# Altium PCB test1.PcbDoc
Units mil, origin at the board's own origin, x right, y up, seen from the top; angles counter-clockwise.
Board outline 6000 x 4000 mil, 2 copper layers (Top Layer, Bottom Layer); 63 components, 39 nets, 223 pads, 23 vias.
Unrouted connection lines stored in the file: 1.
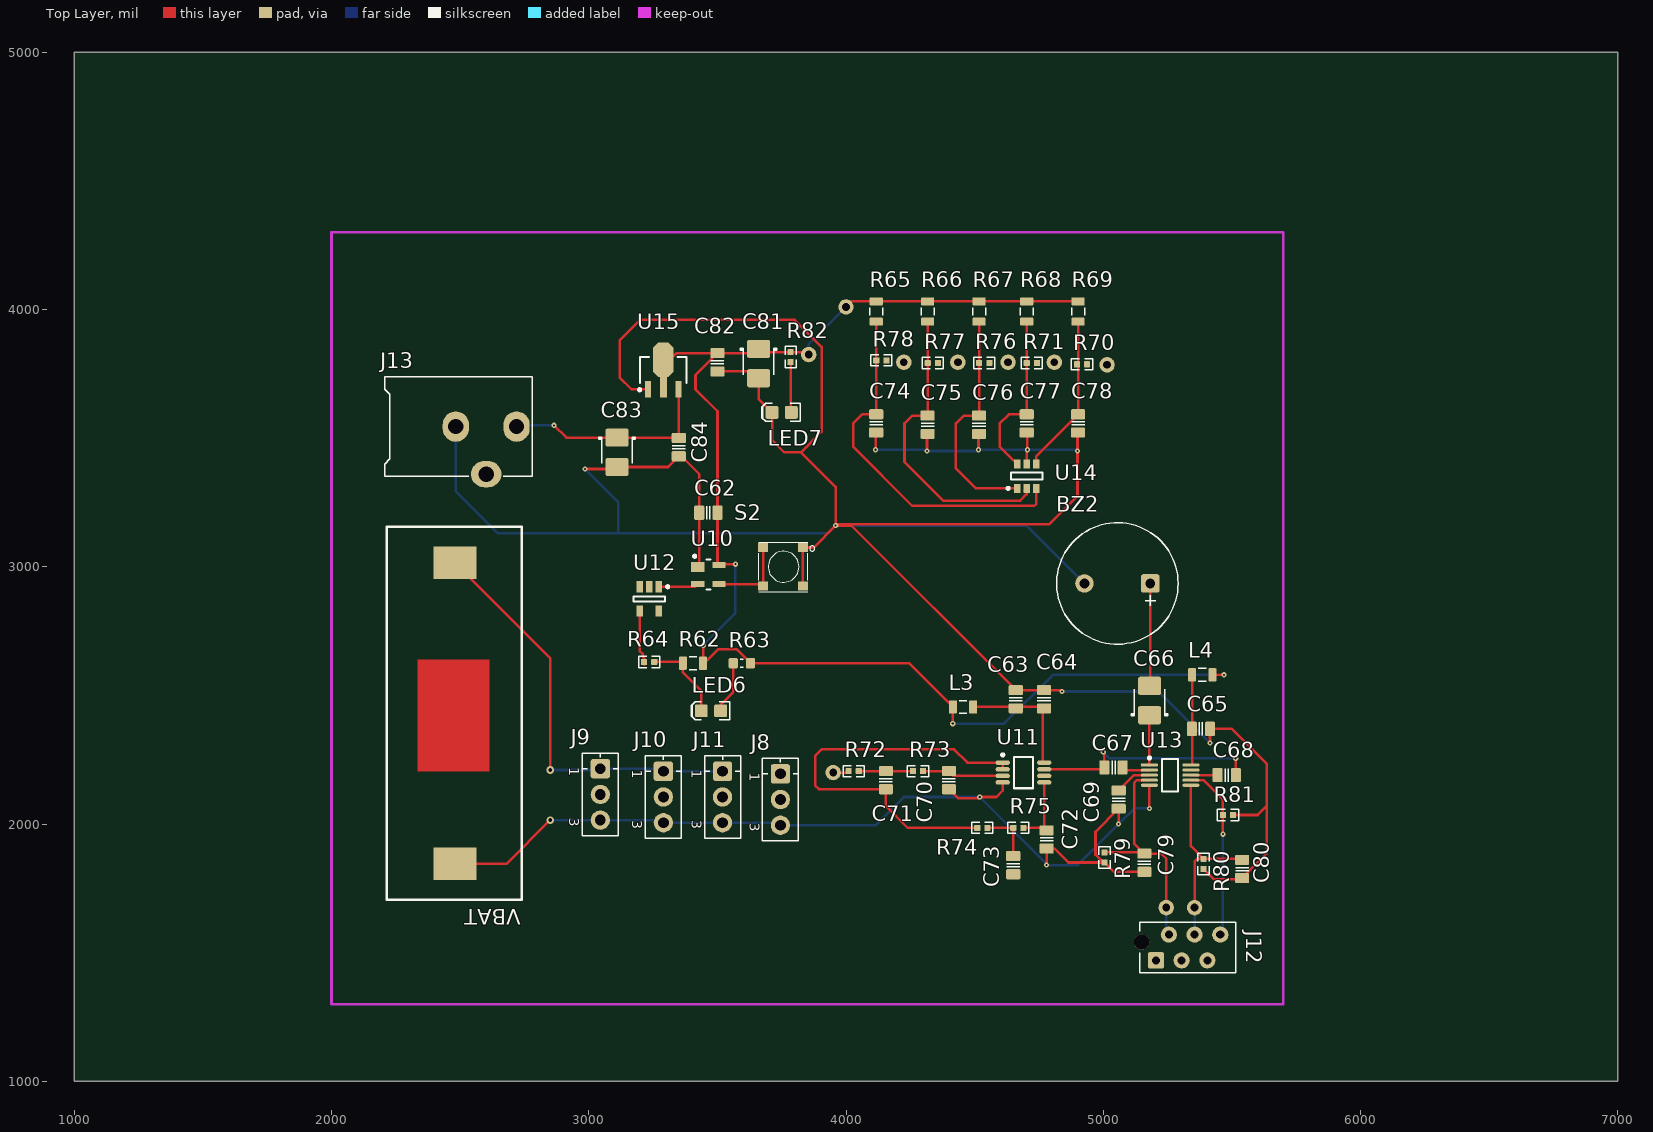
[diagram p0: Top Layer view]
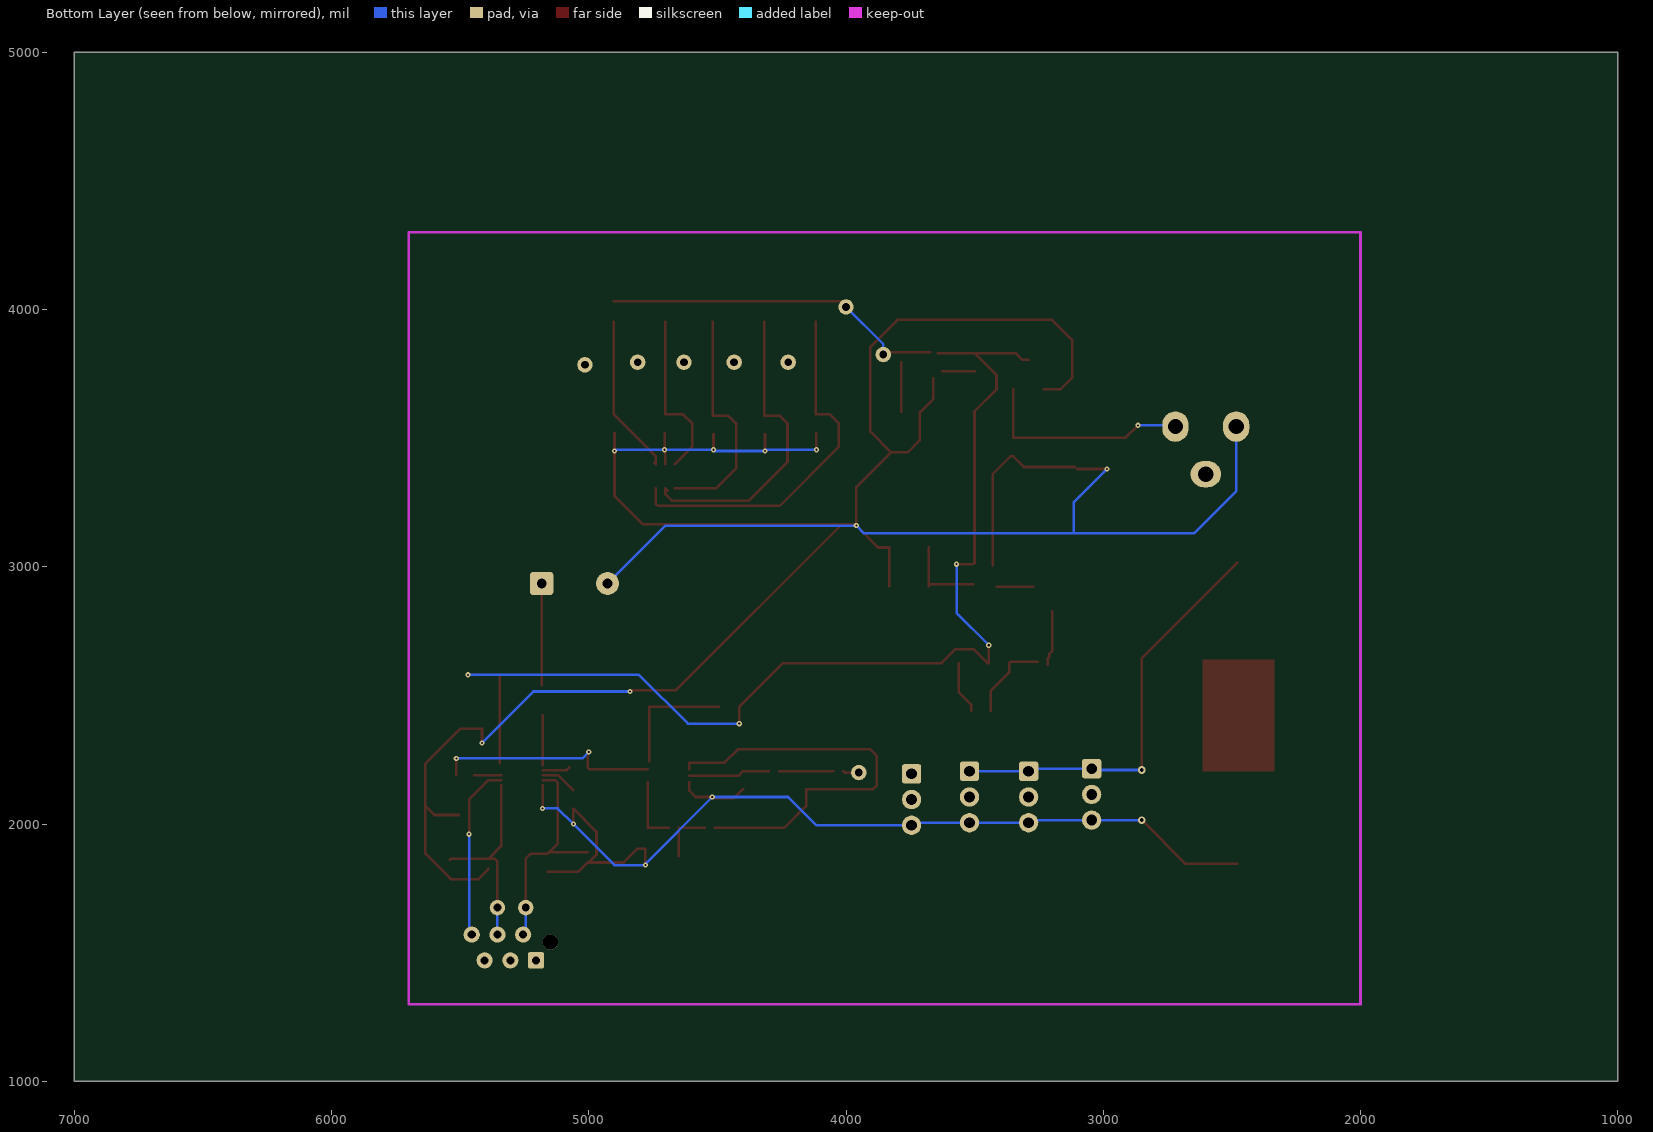
[diagram p1: Bottom Layer view, seen from below]
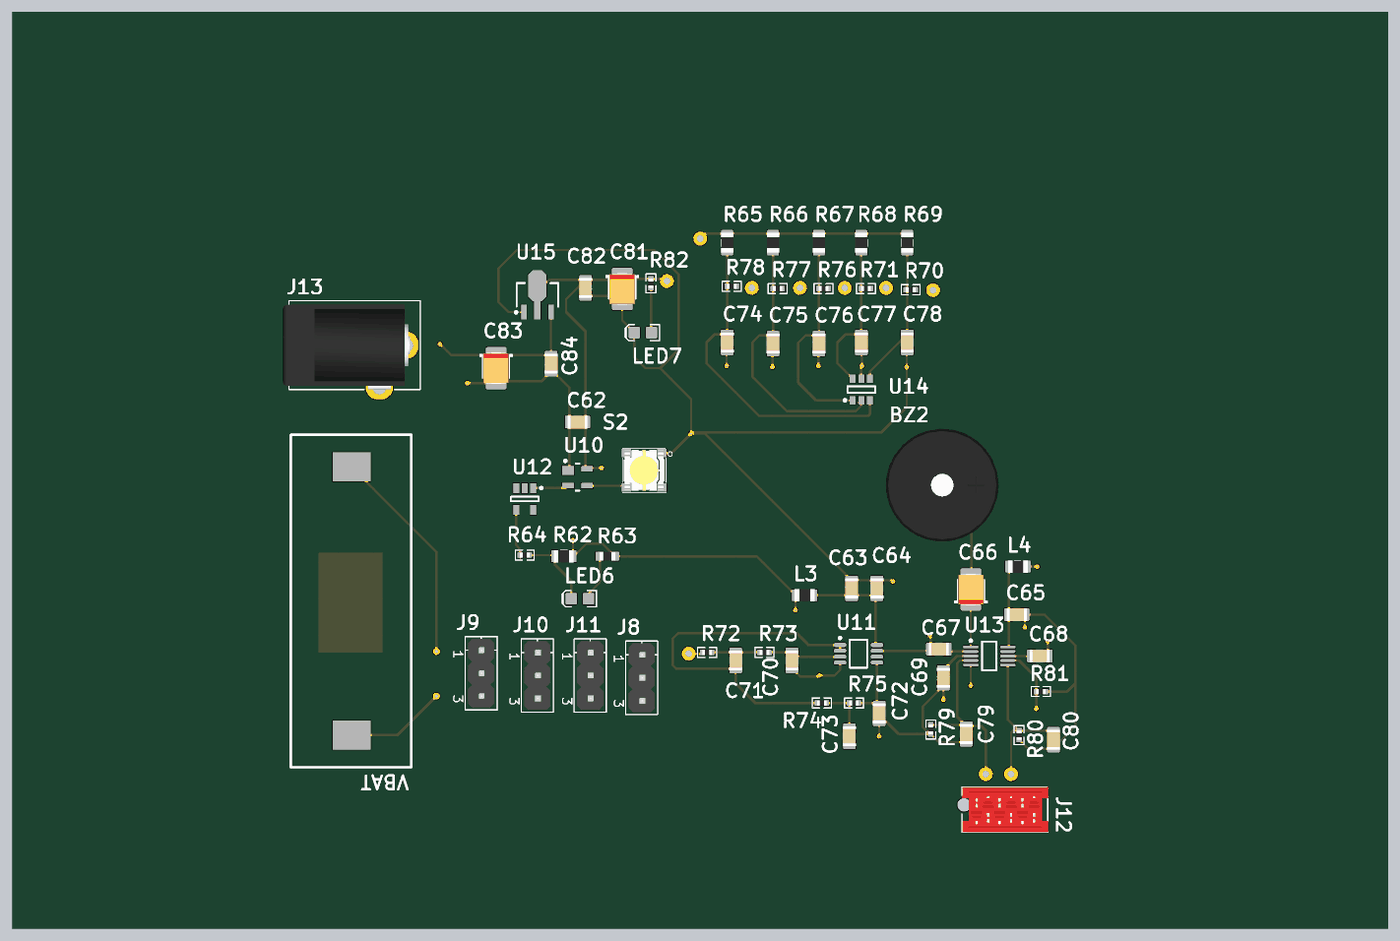
[diagram p2: 3D render of the assembled board from above, using the file's embedded part models]

## Layer stack, top to bottom
Top Layer: signal copper 1.4
Dielectric: dielectric 12.6, FR-4, Dk 4.8
Bottom Layer: signal copper 1.4

## Board outline
1000,1000 7000,1000 7000,5000 1000,5000

## Design rules (kind name [scope] priority, off if disabled: settings)
Clearance [All] p1: gap=10
PolygonConnect [All] p1: connectstyle=Relief reliefconductorwidth=10 reliefentries=4 polygonreliefangle="90 Angle"
RoutingVias [All] p1: holewidth=28 width=50 viastyle="Through Hole" minholewidth=28 minwidth=50 maxholewidth=28 maxwidth=50
SilkscreenOverComponentPads [All] p1: minsilkscreentomaskgap=10
SolderMaskExpansion [All] p1: expansion=4
Width [All] p1: maxlimit=10 minlimit=10 preferedwidth=10
27 further rules are at their usual default settings.

## Components (designator, comment, footprint, x,y, rotation, side; value= is the part's Value field where it differs from the comment)
BZ2 "Alternate part: 3100-932" BUZZER_12.0X8.5MM 5055,2935 r180 top
C62 "approved sub OK" CAPC2012N 3465,3210 r180 top
C63 "approved sub OK" CAPC2012N 4660,2485 r270 top
C64 "approved sub OK" CAPC2012N 4770,2485 r270 top
C65 "approved sub OK" CAPC2012N 5380,2370 r180 top
C66 "Value" CAPMP3528X210N 5180,2480 r90 top
C67 "approved sub OK" CAPC2012N 5040,2220 r0 top
C68 "approved sub OK" CAPC2012N 5480,2190 r0 top
C69 "approved sub OK" CAPC2012N 5060,2095 r90 top
C70 "approved sub OK" CAPC2012N 4400,2170.75 r270 top
C71 "approved sub OK" CAPC2012N 4155,2170.75 r270 top
C72 "approved sub OK" CAPC2012N 4780,1940 r270 top
C73 "approved sub OK" CAPC2012N 4650,1840 r270 top
C74 "approved sub OK" CAPC2012N 4117.4,3557.24 r270 top
C75 "approved sub OK" CAPC2012N 4317.4,3552.24 r270 top
C76 "approved sub OK" CAPC2012N 4517.4,3552.24 r270 top
C77 "approved sub OK" CAPC2012N 4702.4,3557.24 r270 top
C78 "approved sub OK" CAPC2012N 4902.4,3557.24 r270 top
C79 "approved sub OK" CAPC2012N 5160,1849.57 r270 top
C80 "approved sub OK" CAPC2012N 5540,1825 r270 top
C81 "Value" CAPMP3528X210N 3660,3790 r270 top
C82 "approved sub OK" CAPC2012N 3500,3795 r90 top
C83 "Value" CAPMP3528X210N 3110,3445 r270 top
C84 "approved sub OK" CAPC2012N 3350,3465 r90 top
J8 "CONN_HEADER_1x3P_0.100in" 1x3POS_HEADER 3745,2095 r0 top
J9 "CONN_HEADER_1x3P_0.100in" 1x3POS_HEADER 3045,2115 r0 top
J10 "CONN_HEADER_1x3P_0.100in" 1x3POS_HEADER 3290,2105 r0 top
J11 "CONN_HEADER_1x3P_0.100in" 1x3POS_HEADER 3520,2105 r0 top
J12 "micro-match socket" 6P_PCB_SOCKET_BRD_MNT_MICRO-MATCH 5330,1520 r180 top
J13 "CONN_PWR_JACK_2.1x5.5mm" CONN_PWR_JACK_2.1x5.5mm 2180,3545 r90 top
L3 "Thick Film" RESC2012N 4455,2455 r0 top
L4 "Thick Film" RESC2012N 5385,2580 r0 top
LED6 "Red" LED-0805-A 3475,2440 r180 top
LED7 "Green" LED-0805-K 3750,3600 r180 top
R62 "Thick Film" RESC2012N 3405,2625 r180 top
R63 "Thick Film" RESC1608N 3595,2625 r180 top
R64 "Thick Film" RESC1005N#1 3235,2630 r0 top
R65 "Thick Film" RESC2012N 4117.4,3992.24 r270 top
R66 "Thick Film" RESC2012N 4317.4,3992.24 r270 top
R67 "Thick Film" RESC2012N 4517.4,3992.24 r270 top
R68 "Thick Film" RESC2012N 4702.4,3992.24 r270 top
R69 "Thick Film" RESC2012N 4902.4,3992.24 r270 top
R70 "Thick Film" RESC1005N#2 4917.4,3787.24 r180 top
R71 "Thick Film" RESC1005N#2 4722.4,3792.24 r180 top
R72 "Thick Film" RESC1005N#3 4030,2205.75 r0 top
R73 "Thick Film" RESC1005N#2 4280,2205.75 r0 top
R74 "Thick Film" RESC1005N#2 4530,1985 r180 top
R75 "Thick Film" RESC1005N#2 4670,1985 r0 top
R76 "Thick Film" RESC1005N#2 4537.4,3792.24 r180 top
R77 "Thick Film" RESC1005N#2 4337.4,3792.24 r180 top
R78 "Thick Film" RESC1005N#2 4137.4,3802.24 r180 top
R79 "Thick Film" RESC1005N#2 5005,1869.88 r90 top
R80 "Thick Film" RESC1005N#2 5390,1845 r90 top
R81 "Thick Film" RESC1005N#2 5485,2035 r180 top
R82 "Thick Film" RESC1005N#2 3785,3815 r90 top
S2 "SW_THT_PB_5.0mm" SWITCH_TACT-EVQPQxB55 3755,3000 r0 top
U10 "CAT811S" SOT-143-RC4_N 3465,2970 r0 top
U11 "MCP6022" MSOP-UA8_L 4690,2200 r0 top
U12 "74LVC1G125GW" SOT-23-CT5_N 3235,2875 r270 top
U13 "LM4811MM" MSOP-UN10_N 5260,2190 r0 top
U14 "ALPS-SKQU" SOT-23-CH6_L 4702.4,3352.24 r90 top
U15 "LM1117M3-3.3" SOT-89-MB3_M 3290,3765 r90 top
VBAT "" PCBComponent_1 2590,2280 r270 top

## Footprints (in the part's own frame and the unit in brackets; to place one, negate y for a bottom-side part, rotate by r counter-clockwise, add the part's x,y. Pads: shape width x height; smd on the part's side, far side on the other; paste and mask are expansions set on the pad)
1x3POS_HEADER [mil] "Connector Header, Single-row 3-position, 0.100\" pitch"
  rrect25% 75x75 hole 42: 1(0,100)
  round 75 hole 42: 2(0,0) 3(0,-100)
  silkscreen extent -70,-160 70,160, body extent -57,-150 57,150, height 335
6P_PCB_SOCKET_BRD_MNT_MICRO-MATCH [mm] "SOCKET MICRO-MATCH BRD MNT 6POS 2.54MM"
  round 1.016 on Mech14: 0(0,0)
  rrect25% 1.6x1.6 hole 0.8: 1(3.175,1.27)
  round 1.6 hole 0.8: 2(1.905,-1.27) 3(0.635,1.27) 4(-0.635,-1.27) 5(-1.905,1.27) 6(-3.175,-1.27)
  round 1.5 hole 1.5 unplated: MH(4.575,-0.53)
  silkscreen extent -4.7,-2.5 4.8,2.5, body extent -4.77,-2.5 4.78,2.5, height 4
BUZZER_12.0X8.5MM [mil]
  round 20 on Mech14: 0(0,0)
  rrect25% 72x72 / inner rrect25% 72x72 / far side rrect25% 90x90 hole 38: 1(-127.95,0)
  round 72 / inner round 72 / far side round 90 hole 38: 2(127.95,0)
  silkscreen extent -236,-236 236,236, body extent -246,-246 246,246, height 354
CAPC2012N [mm] "Chip Capacitor, Body 2.0x1.2mm, 0805, IPC Medium Density"
  round 0.254 on Mech14: 0(0,0)
  rrect25% 1x1.4 smd: 1(-0.9,0) 2(0.9,0)
  Top Layer pour cut-out: -0.4,0.8 0.4,0.8 0.4,-0.8 -0.4,-0.8
  silkscreen extent -0.15,-0.65 0.15,0.65, body extent -1.1,-0.72 1.1,0.73, height 1.34
CAPMP3528X210N [mm] "Molded body capacitor, Body 3.5x2.8mm, 1210, IPC Nominal settings"
  round 0.254 on Mech14: 0(0,0)
  rrect25% 1.8x2.3 smd: 1(-1.45,0) 2(1.45,0)
  Top Layer pour cut-out: -0.508,1.27 0.508,1.27 0.508,-1.27 -0.508,-1.27
  silkscreen extent -1.5,-1.8 1.1,1.8, body extent -1.75,-1.4 1.75,1.4, height 2.1
CONN_PWR_JACK_2.1x5.5mm [mm] "Power Connector, 2.1mm ID, 5.5mm OD"
  oval 3x2.6 hole 1.511: 1(0,-13.7) 2(0,-7.7)
  oval 2.6x3 hole 1.511: 3(-4.7,-10.7)
  silkscreen extent -4.9,-15.22 4.92,-0.7, body extent -4.9,-14.1 4.5,0, height 11
LED-0805-A [mil]
  round 20 on Mech14: 0(0,0)
  rrect25% 50x50 smd: A(-37.5,0) K(37.5,0)
  Top Layer pour cut-out: -15,30 15,30 15,-30 -15,-30
  silkscreen extent -72,-35 77,35, body extent -39,-25 39,25, height 31
LED-0805-K [mil]
  round 20 on Mech14: 0(0,0)
  rrect25% 50x50 smd: A(-37.5,0) K(37.5,0)
  Top Layer pour cut-out: -15,30 15,30 15,-30 -15,-30
  silkscreen extent -72,-35 77,35, body extent -39,-25 39,25, height 31
MSOP-UA8_L [mm] "TSOP, 8-Leads, Body 3x3mm, Pitch 0.65mm, IPC High Density"
  oval 1.4x0.45 smd: 1(-2.05,0.975) 2(-2.05,0.325) 3(-2.05,-0.325) 4(-2.05,-0.975) 5(2.05,-0.975) 6(2.05,-0.325) 7(2.05,0.325) 8(2.05,0.975)
  silkscreen extent -2.17,-1.55 0.95,1.87, body extent -1.6,-1.6 1.6,1.6, height 1.1
MSOP-UN10_N [mm] "TSSOP, 10-Leads, Body 3x3mm, Pitch 0.5mm, IPC Medium Density"
  oval 1.7x0.3 smd: 1(-2.05,1) 2(-2.05,0.5) 3(-2.05,0) 4(-2.05,-0.5) 5(-2.05,-1) 6(2.05,-1) 7(2.05,-0.5) 8(2.05,0) 9(2.05,0.5) 10(2.05,1)
  silkscreen extent -2.17,-1.6 0.8,1.82, body extent -1.6,-1.6 1.6,1.6, height 1.1
PCBComponent_1 [mil]
  rect 125.98x165.35 smd: GND(435,-110) VCC(-735,-110)
  Top Layer region: -360,-255 75,-255 75,25 -360,25
  silkscreen extent -875,-375 575,150
RESC1005N#1 [mm] "Chip Resistor, Body 1.0x0.5mm, EIA 0402, IPC Medium Density"
  round 0.2 on Mech14: 0(0,0)
  rrect20% 0.6x0.6 smd: 2(0.5,0) Y(-0.5,0)
  Top Layer pour cut-out: -0.2,0.35 0.2,0.35 0.2,-0.35 -0.2,-0.35
  silkscreen extent -1.05,-0.55 1.05,0.55, body extent -0.52,-0.27 0.53,0.28, height 0.4
RESC1005N#2 [mm] "Chip Resistor, Body 1.0x0.5mm, EIA 0402, IPC Medium Density"
  round 0.2 on Mech14: 0(0,0)
  rrect20% 0.6x0.6 smd: 1(-0.5,0) 2(0.5,0)
  Top Layer pour cut-out: -0.2,0.35 0.2,0.35 0.2,-0.35 -0.2,-0.35
  silkscreen extent -1.05,-0.55 1.05,0.55, body extent -0.52,-0.27 0.53,0.28, height 0.4
RESC1005N#3 [mm] "Chip Resistor, Body 1.0x0.5mm, EIA 0402, IPC Medium Density"
  round 0.2 on Mech14: 0(0,0)
  rrect20% 0.6x0.6 smd: 2(0.5,0) p0(-0.5,0)
  Top Layer pour cut-out: -0.2,0.35 0.2,0.35 0.2,-0.35 -0.2,-0.35
  silkscreen extent -1.05,-0.55 1.05,0.55, body extent -0.52,-0.27 0.53,0.28, height 0.4
RESC1608N [mm] "Chip Resistor, Body 1.6x0.8mm, 0603, IPC Medium Density"
  round 0.254 on Mech14: 0(0,0)
  rrect25% 0.9x1 smd: 1(-0.85,0) 2(0.85,0)
  Top Layer pour cut-out: -0.4,0.6 0.4,0.6 0.4,-0.6 -0.4,-0.6
  silkscreen extent -0.15,-0.41 0.15,0.41, body extent -0.87,-0.47 0.88,0.48, height 0.54
RESC2012N [mm] "Chip Resistor, Body 2.0x1.2mm, 0805, IPC Medium Density"
  round 0.254 on Mech14: 0(0,0)
  rrect25% 0.8x1.3 smd: 1(-1,0) 2(1,0)
  Top Layer pour cut-out: -0.6,0.75 0.6,0.75 0.6,-0.75 -0.6,-0.75
  silkscreen extent -0.38,-0.64 0.38,0.64, body extent -1.1,-0.67 1.1,0.68, height 0.69
SOT-23-CH6_L [mm] "SOT23, 6-Leads, Body 2.9x1.6mm, Pitch 0.95mm, Lead Span 2.7mm, IPC High Density"
  rect 0.9x0.65 smd: 1(-1.2,0.95) 2(-1.2,0) 3(-1.2,-0.95) 4(1.2,-0.95) 5(1.2,0) 6(1.2,0.95)
  silkscreen extent -1.32,-1.55 0.35,1.95, body extent -0.9,-1.55 0.9,1.55, height 1.45
SOT-23-CT5_N [mm] "SOT23, 5-Leads, Body 2.9x1.6mm, Pitch 0.95mm, Lead Span 2.7mm, IPC Medium Density"
  rect 1.1x0.65 smd: 1(-1.2,0.95) 2(-1.2,0) 3(-1.2,-0.95) 5(1.2,0.95) Y(1.2,-0.95)
  silkscreen extent -1.32,-1.55 0.25,1.95, body extent -0.9,-1.55 0.9,1.55, height 1.45
SOT-89-MB3_M [mm] "SOT89, 3-Leads, Body 4.5x2.4 mm, Pitch 1.5mm, Lead Span 4.1mm, IPC Low Density"
  rect 1.6x0.6 smd: 1(-1.9,1.5) 3(-1.9,-1.5)
  rect 2x0.7 smd: 2(-1.7,0)
  oct 3.4x2 smd: 2(1,0)
  silkscreen extent -2.07,-2.3 1.3,2.47, body extent -1.3,-2.3 1.3,2.3, height 1.6
SOT-143-RC4_N [mm] "SOT143, 4-Leads, Body 2.9x1.3mm, Pitch 1.9mm, Lead Span 2.4mm, IPC Medium Density"
  rect 1.3x1 smd: 1(-1.05,0.75)
  rect 1.3x0.6 smd: 2(-1.05,-0.95) 3(1.05,-0.95) 4(1.05,0.95)
  silkscreen extent -1.47,-1.5 0.2,1.92, body extent -0.7,-1.52 0.7,1.52, height 1.22
SWITCH_TACT-EVQPQxB55 [mil] "Panasonic SMD tact switch 4.5x4.5x0.55mm, EVQPQxB55"
  rect 40x35 smd: 1(77.5,-75) 1(77.5,75) 2(-77.5,-75) 2(-77.5,75)
  silkscreen extent -94,-97 124,96, body extent -89,-89 89,89, height 22

## Part data
BZ2: library part BZ_12x8.5x6.5_2kHz, "Speaker, Magnetic Transducer"
C62 C63 C64 C65 C67 C68 C69 C70 C71 C72 C73 C74 C75 C76 C77 C78 C79 C80 C82 C84: library part CAPC_100n_0805, "Capacitor SMD Cer 100nF 10% 50V X7R 0805"
C66 C81 C83: library part CAPT_100u_1210_6V3, "Capacitor SMD Tantalum 100uF 20% 6.3V 1210"
J8 J9 J10 J11: "Pin Header, THT, Single-row, 2.54mm pitch"
J12: library part CONN_SOCKET_2x3P_0.100in_Female, "Socket THD 6 POS Double-row 2.54mm pitch"
J13: "Power Connector, THT, 2.1mm ID, 5.5mm OD"
L3 L4 R62 R65 R66 R67 R68 R69: library part RES_10K_0805_5%, "Resistor SMD chip 10k Ohm 0.125W 5% 0805"
LED6: library part LED_SMD_Red_0805, "LED, 0805 SMD, Red"
LED7: library part LED_SMD_Green_0805_8mcd, "LED, 0805 SMD, Green"
R63: library part RES_470R_0603_5%, "Resistor SMD chip 470 Ohm 0.1W 5% 0603"
R64 R70 R71 R72 R73 R74 R75 R76 R77 R78 R79 R80 R81 R82: library part RES_330R_0402_5%, "Resistor SMD chip 330 Ohm 0.063W 5% 0402"
S2: "Switch, tact, 5.0mm stem"
VBAT: library part BATT_AAAx2_600mAh, "Battery pack, 2-cell AAA"

## Free pads (board coordinates)
  round 60 hole 30: 1(5245,1675) 2(5355,1675) 7(3855,3825) 7(4000,4010) 8(4225,3795) 9(4435,3795) 10(4630,3795) 11(4810,3795) 12(5015,3785) p0(3950,2200)

## Via types
v1: diameter 20, hole 8, Top Layer to Bottom Layer, 21 vias
v2: diameter 30, hole 15, Top Layer to Bottom Layer, 2 vias

## Nets (pads, with @x,y where several pads share a name; then routed paths per layer and width w, separated by ;. In a path a pad name is that pad's centre, name@x,y a point inside that pad or via, vN(x,y) a via of type N, cw(c..) or ccw(c..) an arc to the next point about the centre after c; other vN are vias at no path point)
+3V3: C62.1 C81.1 C82.2 L3.1 L4.2 pad.7 R62.1 R63.1 R65.1 R66.1 R67.1 R68.1 R69.1 R82.2 U10.4 U15.2 | length 5392.5
  Top Layer w10: U15.2@3290,3804.37 3314.37,3804.37 3340.43,3830.43 C82.2 ; R62.1 3450,2625 3505,2680 3573.46,2680 R63.1 4245.63,2625 L3.1 ; R62.1@3445,2625.63 v1(3445,2695) ; U10.4@3500.43,3013.31 C62.1 3500.43,3604.57 3415,3690 3415,3745.43 C82.2 ; U10.4@3508.94,3010 v1(3570,3010) ; C81.1@3643.35,3830.43 C82.2 ; C81.1@3672.4,3834.68 R82.2 3845.32,3834.68 pad.7@3855,3825 ; 4021.61,4031.61 R65.1 R66.1 R67.1 R68.1 R69.1 ; v1(4415,2390) L3.1@4415,2454.37 ; L4.2 v1(5470,2580)
  Bottom Layer w10: v1(3445,2695) 3570,2820 v1(3570,3010) ; pad.7@3855,3825 3855,3865 pad.7@4000,4010 ; v1(4415,2390) 4615,2390 4805,2580 v1(5470,2580)
AD0: J9.2
AD1: J10.2
AD2: J11.2
GND: BZ2.2 C62.2 C63.1 C64.1 C65.1 C69.1 C70.2 C72.2 C74.2 C75.2 C76.2 C77.2 C78.2 C79.2 C80.2 C81.2 C82.1 C83.2 C84.1 J8.3 J9.3 J10.3 J11.3 J13.2 LED7.K R79.1 R80.1 R81.1 S2.1 U10.1 U11.4 U13.5 U14.5 U15.1 VBAT.GND | length 16156.7
  Top Layer w10: VBAT.GND 2680,1845 v2(2850,2015) ; v1(2985,3380) C83.2@3102.09,3380 ; C83.2 3308.35,3387.91 C84.1 3360.43,3429.57 3429.57,3360.43 C62.2 U10.1@3429.57,3005.43 ; U15.1 3165.2,3690.2 3120,3735.39 3120,3880 3200,3960 3800,3960 3905,3855 3905,3525 3825,3445 ; C82.1 C81.2@3625.43,3759.57 ; C81.2 3660,3652.5 LED7.K 3712.5,3492.5 3760,3445 3825,3445 ; S2.1@3832.5,2925 3832.5,3075 3875,3075 v1(3960,3160) ; v1(4115,3455) C74.2@4115,3519.41 ; v1(4315,3450) C75.2@4315,3514.41 ; C70.2 4435,2100.31 v1@4515.31,2100.31 ; v1(4515,3455) C76.2@4515,3514.41 ; v1(4520,2105) 4585,2105 4609.29,2129.29 U11.4 ; U14.5 v1@4702.4,3452.4 ; v1(4705,3455) C77.2@4705,3519.21 ; v1(4780,1840) C72.2 4810.43,1904.57 4864.8,1850.2 R79.1@5000.92,1850.2 ; v1@4834.57,2520.43 C64.1 C63.1 4020.43,3160 v1(3960,3160) ; C78.2@4900,3519.41 v1(4900,3450) 4900,3275 4790,3165 3965,3165 v1(3960,3160) ; v1(5060,2000) C69.1 4970,1969.57 4970,1881.12 R79.1@5000.92,1850.2 ; C79.2 5041.06,1814.13 R79.1 R79.1@5000.92,1850.2 ; v1(5179.29,2060.71) U13.5 ; R80.1 5430.31,1785 5535.43,1785 C80.2 5635,1884.57 5635,2070 ; v1(5415,2315) C65.1@5415,2369.57 ; C65.1 5500,2370 5635,2235 5635,2070 ; R81.1 5600,2035 5635,2070 ; 3825,3445 3960,3310 v1(3960,3160)
  Bottom Layer w10: J13.2 2483.15,3293.15 2646.3,3130 3115,3130 ; v2(2850,2015) J9.3 3280,2015 J10.3 J11.3 J8.3@3735,2005 ; v1(2985,3380) 3115,3250 3115,3130 ; J8.3 4115,1995 4225,2105 v1(4520,2105) v1@4780,1845 ; v1(4115,3455) v1@4310,3455 ; v1(4315,3450) v1@4510,3450 ; v1(4515,3455) v1(4705,3455) v1@4895,3455 ; v1(4780,1840) 4900,1840 v1(5060,2000) 5120.71,2060.71 v1(5179.29,2060.71) ; v1(4840,2515) 5215,2515 v1(5415,2315) ; BZ2.2 4702.05,3160 v1(3960,3160) 3930,3130 3115,3130
NetBZ2_1: BZ2.1 C66.2 | length 395
  Top Layer w10: C66.2@5182.95,2540.04 BZ2.1
NetC63_2: C63.2 C64.2 L3.2 U11.8 | length 480.7
  Top Layer w10: L3.2 4764.57,2455 U11.8@4764.57,2244.53
NetC65_2: C65.2 L4.1 U13.10 | length 344.5
  Top Layer w10: 5345.63,2235.51 L4.1
NetC66_1: C66.1 U13.1 | length 192.8
  Top Layer w10: U13.1 C66.1@5179.29,2422.2
NetC67_1: C67.1 C68.2 U11.7 | length 882.2
  Top Layer w10: U11.7 4997.36,2212.8 C67.1 v1@5004.57,2275.43 ; C68.2 v1@5515.43,2254.57
  Bottom Layer w10: v1(5000,2280) 5025,2255 v1(5515,2255)
NetC67_2: C67.2 U13.2 | length 108.1
  Top Layer w10: C67.2 5085.75,2209.69 U13.2
NetC68_1: C68.1 U13.8 | length 103.9
  Top Layer w10: U13.8 C68.1
NetC69_2: C69.2 U13.3 | length 144
  Top Layer w10: C69.2 5119.57,2190 U13.3
NetC70_1: C70.1 R73.2 U11.3 | length 317.3
  Top Layer w10: R73.2 4399.57,2205.75 4418.11,2187.2 U11.3
NetC71_1: C71.1 R72.2 R73.1 | length 210.6
  Top Layer w10: R72.2 R73.1
NetC71_2: C71.2 R74.2 U11.1 U11.2 | length 1638.5
  Top Layer w10: R74.2 4240,1985 4155,2070 C71.2 3894.69,2135.31 3880,2150 3880,2265 3905,2290 4420,2290 4471.61,2238.39 U11.1 U11.2
NetC72_1: C72.1 R75.2 U11.5 | length 257.6
  Top Layer w10: R75.2 C72.1@4770.43,1985 ; C72.1@4770.71,1984.72 U11.5
NetC73_1: C73.1 R74.1 R75.1 | length 209.7
  Top Layer w10: R74.1 4649.69,1985 4650,1984.68 C73.1
NetC74_1: C74.1 R65.2 R78.2 U14.3 | length 1426
  Top Layer w10: R65.2 C74.1 4062.83,3592.68 4027.4,3557.24 4027.4,3467.24 4257.4,3237.24 4732.4,3237.24 4739.8,3244.65 U14.3
NetC75_1: C75.1 R66.2 R77.2 U14.2 | length 1201.6
  Top Layer w10: R66.2 C75.1 4257.83,3587.68 4227.4,3557.24 4227.4,3407.24 4377.4,3257.24 4677.4,3257.24 4702.4,3282.24 U14.2 U14.2@4692.8,3295.39
NetC76_1: C76.1 R67.2 R76.2 U14.1 | length 912.4
  Top Layer w10: R67.2 C76.1 4457.83,3587.68 4427.4,3557.24 4427.4,3382.24 4504.65,3305 U14.1
NetC77_1: C77.1 R68.2 R71.2 U14.6 | length 665.6
  Top Layer w10: U14.6 4597.4,3467.09 4597.4,3557.24 4632.83,3592.68 C77.1 R68.2
NetC78_1: C78.1 R69.2 R70.2 U14.4 | length 628
  Top Layer w10: U14.4@4744.96,3404.65 U14.4 4739.8,3430.08 C78.1 R69.2
NetC79_1: C79.1 J12.2 pad.1 R79.2 U13.4 | length 883.8
  Top Layer w10: R79.2 C79.1@5155.43,1889.57 ; U13.4 5130.31,2170.32 5120,2160 5120,1925 C79.1@5155.43,1889.57 ; pad.1 5245,1865 5225,1885 C79.1 C79.1@5155.43,1889.57
  Bottom Layer w10: J12.2@5245,1580 pad.1
NetC80_1: C80.1 J12.4 pad.2 R80.2 U13.6 | length 782.1
  Top Layer w10: U13.6 5340.71,1913.98 R80.2 ; pad.2 5355,1855 5364.69,1864.68 R80.2 ; C80.1 5535.75,1864.68 R80.2
  Bottom Layer w10: J12.4 pad.2
NetC83_1: C83.1 C84.2 J13.1 U15.3 | length 832.6
  Top Layer w10: v1(2865,3550) 2912.91,3502.09 C83.1 C84.2@3348.35,3502.09 ; C84.2@3349.06,3501.38 U15.3
  Bottom Layer w10: J13.1@2724.37,3550 v1(2865,3550)
NetJ12_6: J12.6 R81.2 U13.7 | length 744.6
  Top Layer w10: U13.7 5389.69,2170.32 5465,2095 ; v1(5465.31,1960.32) R81.2 ; 5465,2095 5465,2035.32 R81.2 ; 5465,2095 5465.31,2094.68 R81.2
  Bottom Layer w10: J12.6 5465,1580 v1@5465,1960
NetLED6_A: LED6.A R63.2 | length 205.3
  Top Layer w10: LED6.A 3512.5,2462.5 3561.54,2511.54 R63.2
NetLED7_A: LED7.A R82.1 | length 192.8
  Top Layer w10: LED7.A@3785,3602.5 R82.1
NetS2_2: S2.2 U10.3 | length 313.6
  Top Layer w10: U10.3 S2.2@3669.9,2932.6 ; S2.2@3677.5,2925 S2.2@3677.5,3075
NetU10_2: U10.2 U12.1 | length 140.9
  Top Layer w10: U12.1 U10.2@3413.31,2922.24
P0.27: J12.1
P0.28: J12.3
P2.13: J12.5
RESET_N: LED6.K R62.2 R64.2 | length 320.7
  Top Layer w10: R64.2 R62.2@3360.63,2630 ; R62.2 3365.63,2589.37 3437.5,2517.5 LED6.K
RXD3: J8.1
TXD3: J8.2
VBAT: 
VCC: J9.1 J10.1 J11.1 VBAT.VCC | length 1634.5
  Top Layer w10: VBAT.VCC 2850,2645 v2(2850,2210)
  Bottom Layer w10: v2(2850,2210) 3040,2210 J9.1 3280,2215 J10.1 J11.1
pads on no net: BZ2.0 C62.0 C63.0 C64.0 C65.0 C66.0 C67.0 C68.0 C69.0 C70.0 C71.0 C72.0 C73.0 C73.2 C74.0 C75.0 C76.0 C77.0 C78.0 C79.0 C80.0 C81.0 C82.0 C83.0 C84.0 J12.0 J12.MH J13.3 L3.0 L4.0 LED6.0 LED7.0 R62.0 R63.0 R64.0 R64.Y R65.0 R66.0 R67.0 R68.0 R69.0 R70.0 R70.1 R71.0 R71.1 R72.0 R72.p0 R73.0 R74.0 R75.0 R76.0 R76.1 R77.0 R77.1 R78.0 R78.1 R79.0 R80.0 R81.0 R82.0 U11.6 U12.2 U12.3 U12.5 U12.Y U13.9
copper on no net: | length 309
  Top Layer w10: 3197.6,2827.76 3197.6,2687.4 3197.6,2672.4 3210,2660 3210,2650 3215.32,2644.68 3215.32,2637.03 3215.32,2620 ; 3972.61,2200 3950,2200 4004.57,2200 ; 4010,2205.43 4010.32,2205.75 ; 4004.57,2200 4010.32,2205.75 ; 4004.57,2200 4010.32,2205.75

## Keep-outs
Keep-Out Layer:
  lines w10: 2000,1300 5700,1300 5700,4300 2000,4300 2000,1300

## Text inside footprints (layer, text, board x,y; h text height)
J8: Top Overlay "3" at 3625,2005 h40 r270; Top Overlay "1" at 3625,2200 h40 r270
J9: Top Overlay "3" at 2925,2025 h40 r270; Top Overlay "1" at 2925,2220 h40 r270
J10: Top Overlay "3" at 3170,2015 h40 r270; Top Overlay "1" at 3170,2210 h40 r270
J11: Top Overlay "3" at 3400,2015 h40 r270; Top Overlay "1" at 3400,2210 h40 r270